# Altium PCB CKLink_Lite.PcbDoc
Units mm, origin at the board's own origin, x right, y up, seen from the top; angles counter-clockwise.
Board outline 32.25 x 14 mm, 2 copper layers (Top Layer, Bottom Layer); 28 components, 38 nets, 152 pads, 53 vias.
Unrouted connection lines stored in the file: 3.
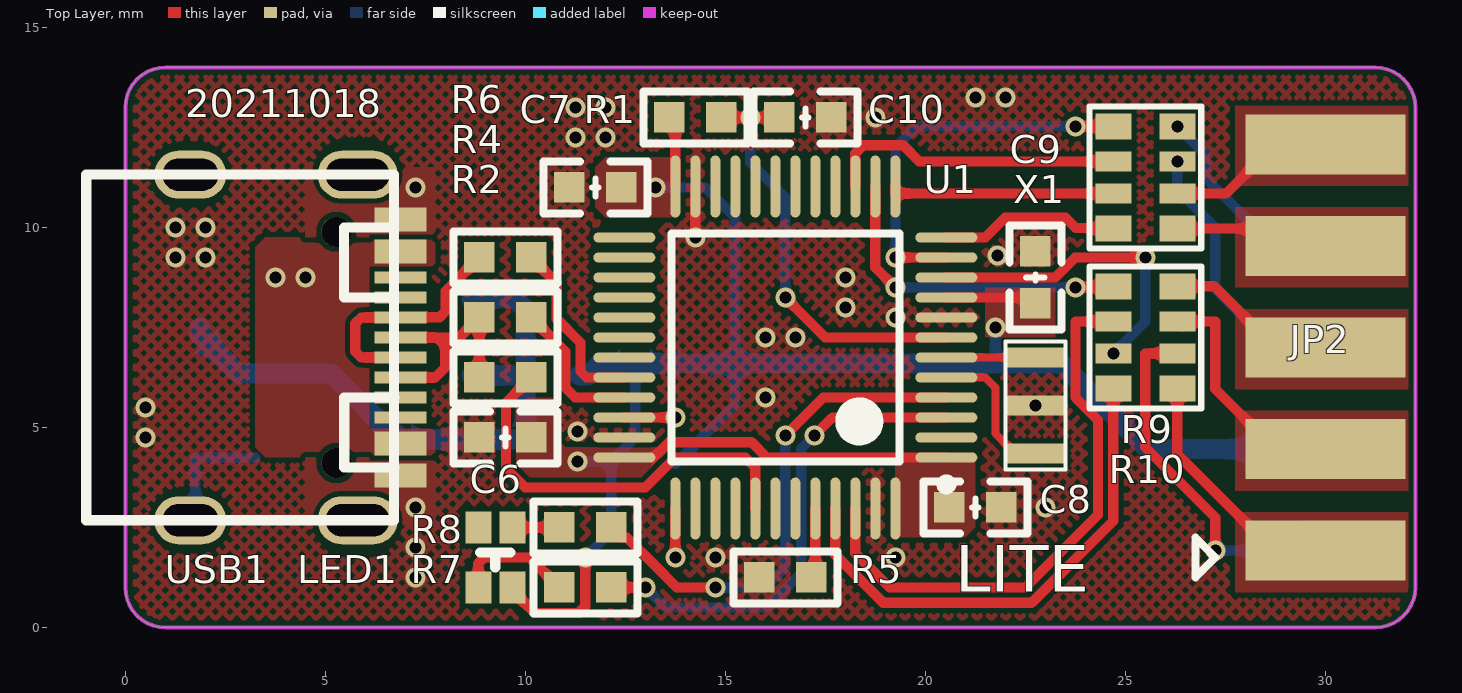
[diagram p0: Top Layer view]
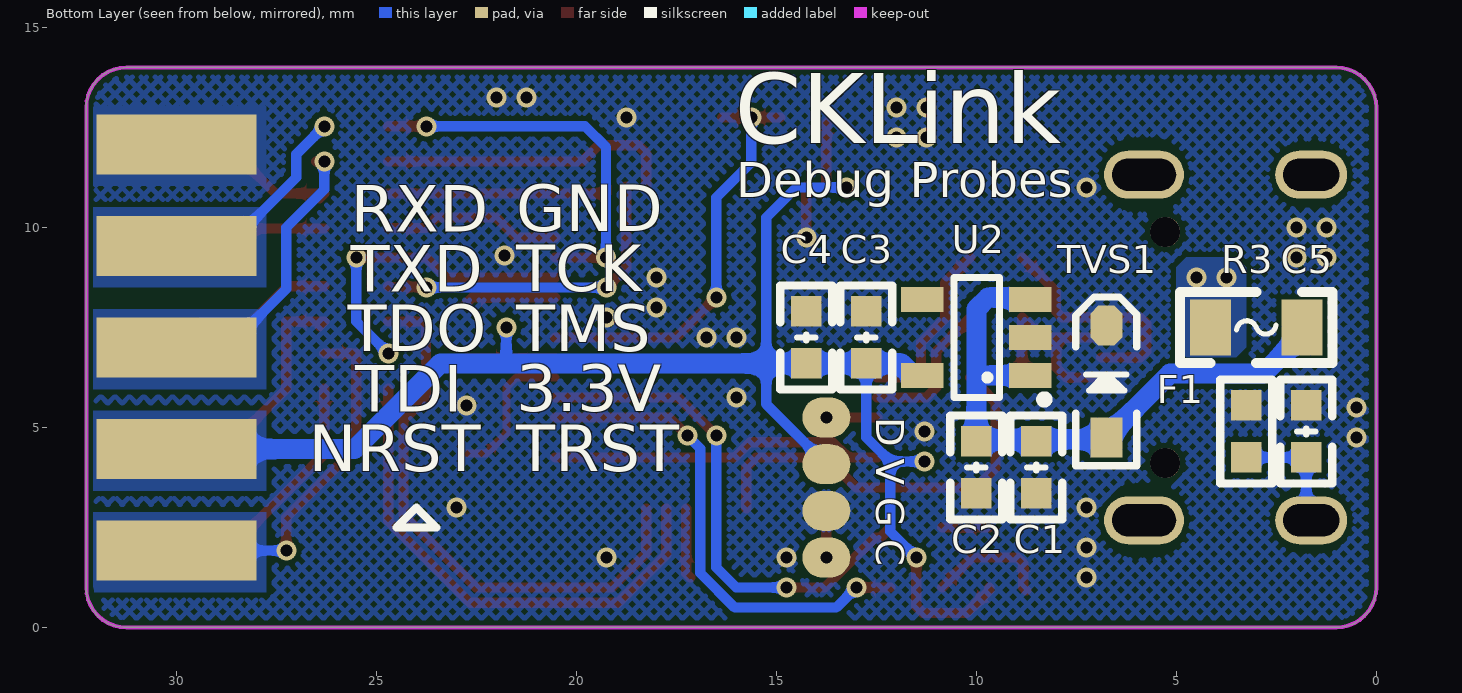
[diagram p1: Bottom Layer view, seen from below]
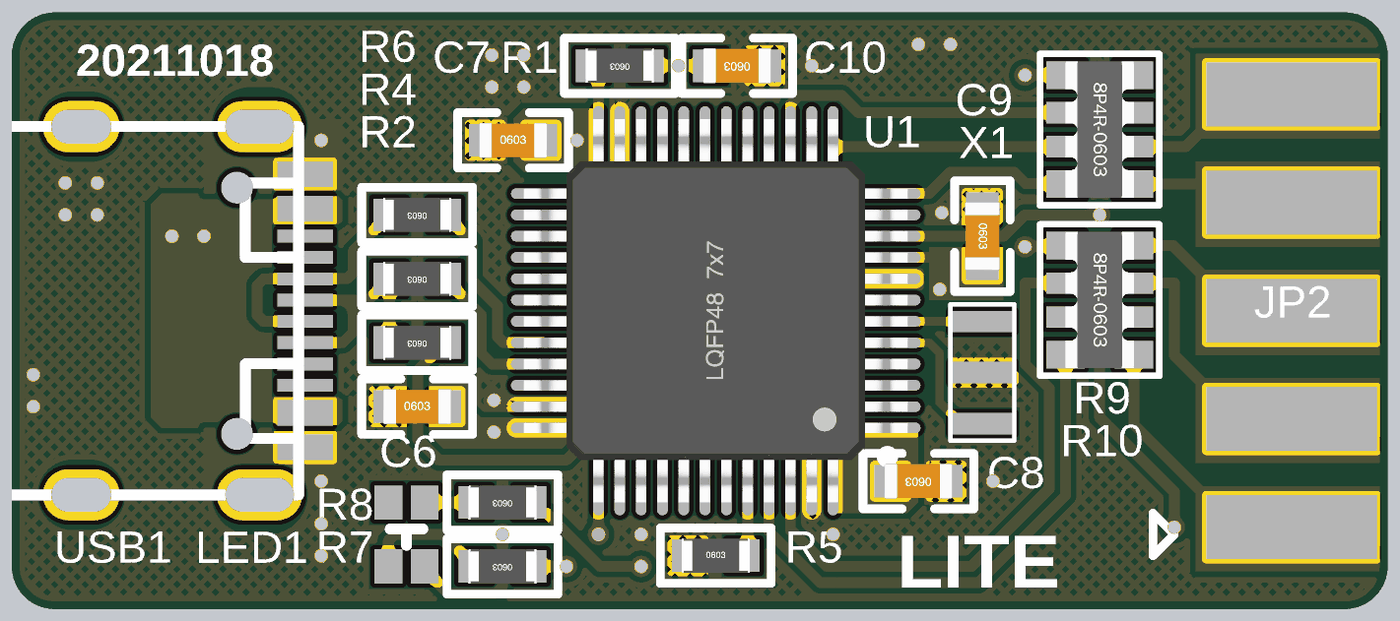
[diagram p2: 3D render of the assembled board from above, using the file's embedded part models]
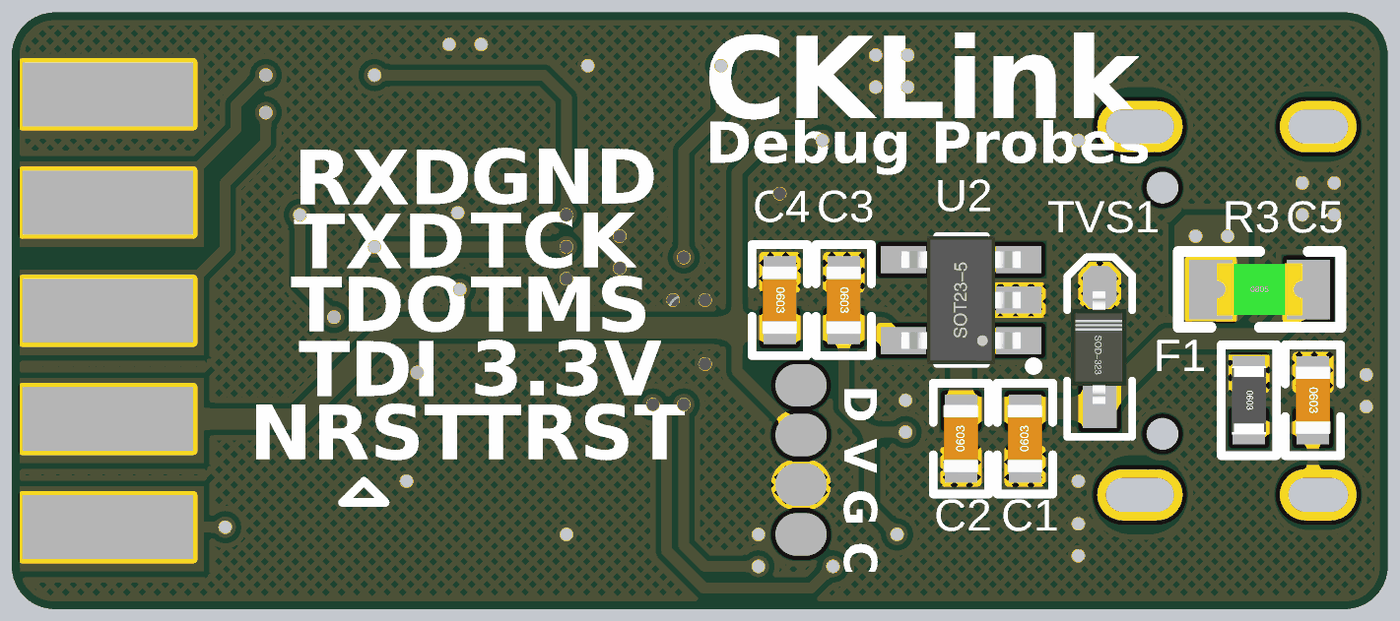
[diagram p3: 3D render of the assembled board from below, using the file's embedded part models]

## Layer stack, top to bottom
Top Solder: solder mask 0.0102, Solder Resist, Dk 3.5
Top Layer: signal copper 0.0356
Dielectric 1: dielectric 0.32, FR-4, Dk 4.8
Bottom Layer: signal copper 0.0356
Bottom Solder: solder mask 0.0102, Solder Resist, Dk 3.5

## Board outline
0,1 0,13 cw(c1,13) 1,14 31.25,14 cw(c31.25,13) 32.25,13 32.25,1 cw(c31.25,1) 31.25,0 1,0 cw(c1,1)

## Design rules (kind name [scope] priority, off if disabled: settings)
Clearance [All] p1: gap=0.127 ignorepadtopadclearanceinfootprint=FALSE
PolygonConnect [All] p1: connectstyle=Direct reliefconductorwidth=0.254 reliefentries=4 polygonreliefangle="90 Angle" airgapwidth=0.254
RoutingVias [All] p1: holewidth=0.711 width=1.27 viastyle="Through Hole" minholewidth=0.711 minwidth=1.27 maxholewidth=0.711 maxwidth=1.27
SolderMaskExpansion [All] p1: expansion=0.102 istentingtop=FALSE
Width [All] p1: maxlimit=2.54 minlimit=0.127 preferedwidth=0.254
30 further rules are at their usual default settings.

## Components (designator, comment, footprint, x,y, rotation, side; value= is the part's Value field where it differs from the comment)
C1 "1uF" "C 0603_L" 8.5,4 r90 bottom
C2 "104" "C 0603_L" 10,4 r90 bottom
C3 "104" "C 0603_L" 12.75,7.25 r270 bottom
C4 "4.7uF" "C 0603_L" 14.25,7.25 r270 bottom
C5 "103" "C 0603_L" 1.75,4.9 r270 bottom
C6 "104" "C 0603_L" 9.5,4.75 r0 top
C7 "104" "C 0603_L" 11.75,11 r0 top
C8 "104" "C 0603_L" 21.25,3 r180 top
C9 "104" "C 0603_L" 22.75,8.75 r270 top
C10 "104" "C 0603_L" 17,12.75 r180 top
F1 "6V 500mA" "FU 0805" 3,7.5 r180 bottom
JP2 "Header 5X2" CHE2*5 30,12.08 r270 top
LED1 "0603RGB" 0603RGB 9.25,1.75 r90 top
R1 "10k" "R 0603_L" 14.25,12.75 r180 top
R2 "1.5k" "R 0603_L" 9.5,6.25 r180 top
R3 "1M" "R 0603_L" 3.25,4.9 r270 bottom
R4 "22R" "R 0603_L" 9.5,7.75 r180 top
R5 "10k" "R 0603_L" 16.5,1.25 r0 top
R6 "22R" "R 0603_L" 9.5,9.25 r180 top
R7 "4.7k" "R 0603_L" 11.5,1 r180 top
R8 "4.7k" "R 0603_L" 11.5,2.5 r180 top
R9 "22R" RCA-8P4R-0603 25.5,11.25 r270 top
R10 "22R" RCA-8P4R-0603 25.5,7.25 r270 top
TVS1 "5V" SOD-323 6.75,6.15 r90 bottom
U1 "STM32F103C8T6" LQFP48_L 16.5,7 r180 top
U2 "ME6211C33" SOT23-5N 10,7.25 r90 bottom
USB1 "TYPE-C 2.0 -16P" USB-TYPE-C_16PIN-MALE-TYPE-C-31-M-12 4.25,7 r270 top
X1 "8MHz" "CSTCE 3pin" 22.75,5.55 r270 top

## Footprints (in the part's own frame and the unit in brackets; to place one, negate y for a bottom-side part, rotate by r counter-clockwise, add the part's x,y. Pads: shape width x height; smd on the part's side, far side on the other; paste and mask are expansions set on the pad)
0603RGB [mm]
  rect 0.8x0.65 smd: 1(-0.75,0.425) 2(0.75,0.425) 3(-0.75,-0.425) 4(0.75,-0.425)
  silkscreen extent -0.25,-0.38 0.13,0.38
"C 0603_L" [mil] "无极性贴片电容                                       淘宝ID:黄晶宝石"
  rect 30x30 smd: 1(-25.59,0) 2(25.59,0)
  silkscreen extent -51,-26 51,26, body extent -31,-16 31,16, height 32
CHE2*5 [mm] "侧边夹板式焊接排针"
  rect 1.5x4 smd: 1(0,0) 3(2.54,0) 5(5.08,0) 7(7.62,0) 9(10.16,0)
  rect 1.5x4 smd far side: 2(0,0) 4(2.54,0) 6(5.08,0) 8(7.62,0) 10(10.16,0)
"CSTCE 3pin" [mm] "村田CSTCE 3脚陶瓷晶振"
  rect 0.5x1.5 smd: 1(1.2,0) 2(0,0) 3(-1.2,0)
  silkscreen extent -1.6,-0.75 1.6,0.75
"FU 0805" [mil] "贴片保险丝"
  rect 40x55 smd: 1(-45,0) 2(45,0)
  silkscreen extent -75,-35 75,35, body extent -39,-24 39,24, height 20
LQFP48_L [mm] "封装库来自淘宝 ID：黄晶宝石 Thin QFP, 48-Leads, Body 7x7mm, Pitch 0.5mm, IPC High Density"
  oval 1.55x0.25 smd: 1(-4.025,2.75) 2(-4.025,2.25) 3(-4.025,1.75) 4(-4.025,1.25) 5(-4.025,0.75) 6(-4.025,0.25) 7(-4.025,-0.25) 8(-4.025,-0.75) 9(-4.025,-1.25) 10(-4.025,-1.75) 11(-4.025,-2.25) 12(-4.025,-2.75) 25(4.025,-2.75) 26(4.025,-2.25) 27(4.025,-1.75) 28(4.025,-1.25) 29(4.025,-0.75) 30(4.025,-0.25) 31(4.025,0.25) 32(4.025,0.75) 33(4.025,1.25) 34(4.025,1.75) 35(4.025,2.25) 36(4.025,2.75)
  oval 0.25x1.55 smd: 13(-2.75,-4.025) 14(-2.25,-4.025) 15(-1.75,-4.025) 16(-1.25,-4.025) 17(-0.75,-4.025) 18(-0.25,-4.025) 19(0.25,-4.025) 20(0.75,-4.025) 21(1.25,-4.025) 22(1.75,-4.025) 23(2.25,-4.025) 24(2.75,-4.025) 37(2.75,4.025) 38(2.25,4.025) 39(1.75,4.025) 40(1.25,4.025) 41(0.75,4.025) 42(0.25,4.025) 43(-0.25,4.025) 44(-0.75,4.025) 45(-1.25,4.025) 46(-1.75,4.025) 47(-2.25,4.025) 48(-2.75,4.025)
  silkscreen extent -4.15,-2.85 2.85,3.55, body extent -4.5,-4.5 4.5,4.5, height 1.45
"R 0603_L" [mil] "1/10W贴片电阻                 淘宝ID:黄晶宝石"
  rect 30x30 smd: 1(-25.59,0) 2(25.59,0)
  silkscreen extent -51,-26 51,26, body extent -31,-16 32,16, height 16
RCA-8P4R-0603 [mm] "3.2mm*1.6mm*0.6mm(长*宽*厚)"
  rect 0.65x0.9 smd: 1(-1.28,-0.8) 4(1.28,-0.8) 5(1.28,0.8) 8(-1.28,0.8)
  rect 0.5x0.9 smd: 2(-0.4,-0.8) 3(0.4,-0.8) 6(0.4,0.8) 7(-0.4,0.8)
  silkscreen extent -1.78,-1.4 1.78,1.4, body extent -1.6,-0.8 1.6,0.8, height 0.6
SOD-323 [mm] "1.8x1.3X0.9mm（长宽高，不包括引脚）"
  rect 1x0.8 smd: 1(-1.4,0)
  oct 1x0.8 smd: 2(1.4,0)
  silkscreen extent -2.11,-0.76 2.11,0.76, body extent -1.34,-0.63 1.31,0.67, height 1
SOT23-5N [mm] "3x1.6x1.1mm(长宽高)  封装库来自淘宝卖家 ID：黄晶宝石"
  rect 0.635x1.067 smd: 1(-0.95,-1.35) 2(0,-1.35) 3(0.95,-1.35) 4(0.95,1.35) 5(-0.95,1.35)
  silkscreen extent -1.63,-1.78 1.5,0.56, body extent -1.5,-1.4 1.5,1.4, height 1.15
USB-TYPE-C_16PIN-MALE-TYPE-C-31-M-12 [mm]
  oval 1.2x2 hole 0.8 slot 1.6 at 90 deg: 0(-4.32,1.556) 0(4.32,1.556)
  oval 1.2x1.8 hole 0.8 slot 1.4 at 90 deg: 0(-4.32,-2.624) 0(4.32,-2.624)
  rect 0.3x1.3 smd: A1(-3.35,2.623) A4(-2.55,2.623) A5(-1.25,2.623) A6(-0.25,2.623) A7(0.25,2.623) A8(1.25,2.624) A9(2.55,2.623) A12(3.35,2.623) B1(3.05,2.623) B4(2.25,2.623) B5(1.75,2.623) B6(0.75,2.623) B7(-0.75,2.623) B8(-1.75,2.624) B9(-2.25,2.623) B12(-3.05,2.623)
  round 0.75 hole 0.75 unplated: ""(-2.89,1.026) ""(2.89,1.026)
  silkscreen extent -4.32,-5.23 4.32,2.47

## Part data
C1 C2 C3 C4 C5 C6 C7 C8 C9 C10: library part C, "贴片电容", BOM名称=无极性贴片电容, 优秀评价可免费更新=联系淘宝ID：黄晶宝石，获取更新版封装库, 卖家免费技术支持，联系售后=唯一出售店铺网址https://shop463601444.taobao.com, 本封装库来自淘宝卖家 ID：黄晶宝石=其他店铺购入均为盗版，请立即申请退款
F1: library part FU, "贴片保险丝", BOM名称=贴片保险丝, 优秀评价可免费更新=联系淘宝ID：黄晶宝石，获取更新版封装库, 卖家免费技术支持，联系售后=唯一出售店铺网址https://shop463601444.taobao.com, 封装库来自淘宝卖家 ID：黄晶宝石=其他店铺购入均为盗版，请立即申请退款, 版权归属="封装库来自淘宝卖家 ID：黄晶宝石"
JP2: "5*2P接插件", BOM名称=5*2P接插件, 优秀评价可免费更新=联系淘宝ID：黄晶宝石，获取更新版封装库, 卖家免费技术支持，联系售后=唯一出售店铺网址https://shop463601444.taobao.com, 版权归属="封装库来自淘宝 ID：黄晶宝石"
R1 R2 R3 R4 R5 R6 R7 R8: library part R, "贴片电阻", BOM名称=贴片电阻, 优秀评价可免费更新=联系淘宝ID：黄晶宝石，获取更新版封装库, 卖家免费技术支持，联系售后=唯一出售店铺网址https://shop463601444.taobao.com, 本封装库来自淘宝卖家 ID：黄晶宝石=其他店铺购入均为盗版，请立即申请退款
R9 R10: library part R-8P4R, "贴片排阻", BOM名称=贴片网络排阻, 优秀评价可免费更新=联系淘宝ID：黄晶宝石，获取更新版封装库, 卖家免费技术支持，联系售后=唯一出售店铺网址https://shop463601444.taobao.com, 本封装库来自淘宝卖家 ID：黄晶宝石=其他店铺购入均为盗版，请立即申请退款
TVS1: library part TVS, "TVS保护", Code_JEDEC=DO-214-AB, 优秀评价可免费更新=联系淘宝ID：黄晶宝石，获取更新版封装库, 卖家免费技术支持，联系售后=唯一出售店铺网址https://shop463601444.taobao.com, 封装库 来自淘宝卖家 ID：黄晶宝石=其他店铺购入均为盗版，请立即申请退款
U1: "STM32 ARM-based 32-bit MCU Performance Line with 64 kB Flash, 20 kB Internal RAM, -40 to +85癈 Temperature, 48-Pin LQFP, Tray", DatasheetVersion="rev13.0, Apr-2011", PackageDescription="48-Pin Low-Profile Quad Flat Pack, 7 x 7 mm Body, 0.5 mm Pitch (LQFP48)", PackageReference=LQFP48, PackageVersion="rev13, Apr-2011", 优秀评价可免费更新=联系淘宝ID：黄晶宝石，获取更新版封装库, 卖家免费技术支持，联系售后=唯一出售店铺网址https://shop463601444.taobao.com, 封装库来自淘宝卖家 ID：黄晶宝石=其他店铺购入均为假冒，请申请退款，本店现金奖励
U2: "3.3V 500mA 低压差线性稳压器"
USB1: library part "USB2.0 Type-C 16Pin母座", "USB2.0 Type-C 母座 16Pin", BOM_Manufacturer=LCSC, BOM_Manufacturer Part=-, BOM_Supplier=LCSC, spicePre=U, spiceSymbolName="TYPE-C 3.1 -16P_C168689"
X1: library part XTAL-3P, "3脚无源晶振", BOM名称=4脚无源晶振, 优秀评价可免费更新=联系淘宝ID：黄晶宝石，获取更新版封装库, 卖家免费技术支持，联系售后=唯一出售店铺网址https://shop463601444.taobao.com, 封装库来自淘宝卖家 ID：黄晶宝石=其他店铺购入均为盗版，请立即申请退款, 版权归属="封装库来自淘宝卖家 ID：黄晶宝石"

## Free pads (board coordinates)
  oval 1.2x1 smd far side: 20(13.75,1.75) 21(13.75,2.917) 22(13.75,4.083) 23(13.75,5.25)

## Via types
v1: diameter 0.5, hole 0.3, Top Layer to Bottom Layer, tented both sides, 53 vias

## Nets (pads, with @x,y where several pads share a name; then routed paths per layer and width w, separated by ;. In a path a pad name is that pad's centre, name@x,y a point inside that pad or via, vN(x,y) a via of type N, cw(c..) or ccw(c..) an arc to the next point about the centre after c; other vN are vias at no path point)
3.3V: C3.2 C4.2 C6.2 C7.2 C8.2 C9.2 JP2.8 LED1.3 pad.22 R1.2 U1.1 U1.9 U1.24 U1.36 U1.48 U2.5 | length 51.7
  Top Layer w0.254: LED1.3 9.675,0.925 10.235,0.365 11.336,0.365 11.5,0.529 v1(11.5,1.75) ; U1.36 13.211,4.25 13.592,4.631 15.658,4.631 16.039,4.25 U1.1 ; R1.2 13.75,12.6 U1.24 ; U1.9 22.6,8.25 C9.2
  Bottom Layer w0.254: v1(11.3,4.15) 12.15,4.15 ; v1(11.5,1.75) 12.15,2.4 12.15,4.15 ; C3.2 12.75,4.75 12.15,4.15 ; v1(13.25,11) 14.5,11 15.25,10.25 15.25,6.6 15.25,5.583 pad.22 ; 21.75,6.6 v1(21.75,7.5)
  Bottom Layer w0.5: U2.5 11.566,6.3 11.866,6.6 C3.2 C4.2 15.25,6.6 21.75,6.6 23.4,6.6 25.54,4.46 JP2.8
BOOT0: R5.2 U1.44 | length 1.8
  Top Layer w0.254: R5.2 17.25,1.35 U1.44
GND: C1.1 C2.1 C3.1 C4.1 C5.1 C6.1 C7.1 C8.1 C9.1 C10.1 JP2.2 pad.21 R3.1 R5.1 TVS1.2 U1.8 U1.23 U1.35 U1.47 U2.2 USB1.A1 USB1.A12 USB1.B1 USB1.B12 X1.2 | length 1.3
  Top Layer w0.254: v1(14.25,9.75) U1.23
  other v1: 7.25,1.25 14.75,1.75 19.25,1.75 7.25,2 7.25,3 23,3 0.5,4.75 11.3,4.9 0.5,5.5 22.75,5.55 16,5.75 16,7.25 16.75,7.25 19.25,7.75 18,8 18,8.75 1.25,9.25 2,9.25 21.8,9.3 1.25,10 2,10 7.25,11 11.25,12.25 12,12.25 18.75,12.75 11.25,13 12,13 21.25,13.25 22,13.25
LED_BSY: R8.1 U1.4 | length 12.9
  Top Layer w0.254: R8.1 12.404,2.246 12.541,2.246 13.246,1.541 13.787,1 v1(14.75,1) ; v1(16.5,4.8) 17.45,5.75 U1.4
  Bottom Layer w0.254: v1(14.75,1) 16,1 16.5,1.5 v1(16.5,4.8)
LED_ERR: R7.1 U1.3 | length 12.4
  Top Layer w0.254: R7.1 v1(13,1) ; v1(17.224,4.798) 17.676,5.25 U1.3
  Bottom Layer w0.254: v1(13,1) 13.504,0.496 16.035,0.496 16.9,1.361 16.9,4.474 v1(17.224,4.798)
M_RST: C10.2 R1.1 U1.7 | length 10.8
  Top Layer w0.254: R1.1 v1(15.625,12.75) C10.2 ; v1(16.5,8.25) 17.5,7.25 19.037,7.25 19.041,7.246 19.459,7.246 19.463,7.25 U1.7
  Bottom Layer w0.254: v1(15.625,12.75) 15.625,11.625 16.5,10.75 v1(16.5,8.25)
M_SWD_CLK: pad.20 U1.37 | length 1.2
  Top Layer w0.254: v1(13.75,1.75) U1.37
M_SWD_DIO: pad.23 U1.34 | length 1.3
  Top Layer w0.254: U1.34 v1(13.75,5.25)
M_SWDCK: 
M_SWDIO: 
M_USB_CN: R2.1 U1.41 | length 10.4
  Top Layer w0.254: R2.1 9.515,5.615 9.515,3.985 10,3.5 13,3.5 13.75,4.25 15.5,4.25 15.75,4 U1.41
M_USB_DN: R6.1 U1.32 | length 4.5
  Top Layer w0.254: R6.1 10.785,8.615 10.785,7.715 11.381,7.119 11.381,6.399 11.53,6.25 U1.32
M_USB_DP: R4.1 U1.33 | length 3.8
  Top Layer w0.254: R4.1@10.075,7.675 R4.1 11,6.9 11,6 11.25,5.75 U1.33
NetC1_2: C1.2 C2.2 F1.2 TVS1.1 U2.1 U2.3 | length 16
  Bottom Layer w0.5: F1.2 1.857,7.31 2.822,6.344 5.156,6.344 6.5,5 6.6,5 6.75,4.85 TVS1.1 6.8,4.7 9.95,4.7 C2.2 10,6.304 ; U2.3 8.7,8.25 9.707,8.25 10,7.957 10,6.304 ; U2.1@8.933,6.233 8.718,6.233 U2.1 9.996,6.3 10,6.304
NetC5_2: C5.2 R3.2 USB1.0 | length 3.1
  Bottom Layer w0.254: USB1.0@1.626,2.68 1.75,2.804 C5.2 R3.2
NetLED1_1: LED1.1 R7.2 | length 3.1
  Top Layer w0.254: LED1.1@8.75,0.925 LED1.1 8.825,1.601 8.974,1.75 10.1,1.75 R7.2
NetLED1_4: LED1.4 R8.2 | length 1.2
  Top Layer w0.254: LED1.4 R8.2@10.85,2.5
NRST: R10.4 U1.45 | length 12.8
  Top Layer w0.254: U1.45 17.75,1.819 18.95,0.619 22.658,0.619 24.7,2.661 R10.4
NRST_: JP2.9 R10.5 | length 6.3
  Top Layer w0.254: R10.5 26.3,4.33 28.087,2.543 29.377,2.543 JP2.9
OSC_I: U1.5 X1.1 | length 3.7
  Top Layer w0.2: U1.5 21.5,6.25 21.75,6 21.75,4.85 22.25,4.35 X1.1
OSC_O: U1.6 X1.3 | length 2.2
  Top Layer w0.2: U1.6 X1.3
RXD: R9.3 U1.13 | length 5.6
  Top Layer w0.254: U1.13 19.25,10.852 19.252,10.85 R9.3
RXD_: JP2.1 R9.6 | length 5
  Top Layer w0.254: R9.6@26.423,10.727 R9.6 27.52,10.85 28.75,12.08 JP2.1 JP2.1@29.55,12.53
TCK: R9.1 U1.11 | length 9.7
  Top Layer w0.254: v1(19.254,9.25) U1.11 ; v1@23.78,12.53 R9.1
  Bottom Layer w0.254: v1(19.254,9.25) 19.254,12.004 19.78,12.53 v1(23.75,12.53)
TCK_: JP2.4 R9.8 | length 5.3
  Bottom Layer w0.254: v1(26.3,12.53) 27,11.83 27,11.25 28.087,10.163 29.377,10.163 JP2.4
TDI: R10.2 U1.46 | length 14.3
  Top Layer w0.254: U1.46 18.25,1.858 19.108,1 22.5,1 24.319,2.819 24.319,5.181 23.754,5.746 23.754,7.65 R10.2
TDI_: JP2.7 R10.7 | length 6.2
  Top Layer w0.254: R10.7@26.423,7.527 R10.7 27.25,7.65 27.25,5.96 28.75,4.46 JP2.7
TDO: R10.1 U1.14 | length 8.2
  Top Layer w0.254: U1.14 18.75,9 v1(19.25,8.5) ; v1(23.75,8.5) 23.765,8.515 24.685,8.515 R10.1
  Bottom Layer w0.254: v1(19.25,8.5) v1(23.75,8.5)
TDO_: JP2.5 R10.8 | length 4.3
  Top Layer w0.254: R10.8 27.22,8.53 28.75,7 JP2.5
TMS: R9.2 U1.15 | length 7.5
  Top Layer w0.254: U1.15 18.25,11.851 18.453,12.054 19.446,12.054 19.85,11.65 R9.2
TMS_: JP2.6 R9.7 | length 7.1
  Top Layer w0.254: v1(26.3,11.65) R9.7@26.5,11.65
  Bottom Layer w0.254: v1(26.3,11.65) 26.3,10.95 27.25,10 27.25,8.46 28.087,7.623 29.377,7.623 JP2.6
TRST: R10.3 U1.10 | length 8.1
  Top Layer w0.254: U1.10 23.25,8.75 23.75,9.25 v1(25.5,9.25) ; v1(24.7,6.85) R10.3@24.823,6.973
  Bottom Layer w0.254: v1(24.7,6.85) 25.5,7.65 v1(25.5,9.25)
TRST_: JP2.10 R10.6 | length 9.2
  Top Layer w0.254: R10.6 25.504,6.85 25.5,6.846 25.5,4.5 27.25,2.75 v1(27.25,1.92)
  Bottom Layer w0.254: v1(27.25,1.92) JP2.10
TXD: R9.4 U1.12 | length 4.5
  Top Layer w0.254: U1.12 21.5,9.75 22,10.25 23.5,10.25 23.768,9.982 24.688,9.982 R9.4
TXD_: JP2.3 R9.5 | length 5.1
  Top Layer w0.254: R9.5 29.57,9.97 JP2.3 JP2.3@28.75,9.54
USB_5V: F1.1 USB1.A4 USB1.A9 USB1.B4 USB1.B9
  other v1: 3.75,8.75 4.5,8.75
USB_DN: R6.2 USB1.A7 USB1.B7 | length 6
  Top Layer w0.254: USB1.A7 5.899,6.75 5.75,6.899 5.75,7.601 5.899,7.75 USB1.B7 ; USB1.B7@6.879,7.756 7.857,7.756 8.006,7.905 8.006,8.406 R6.2
USB_DP: R2.2 R4.2 USB1.A6 USB1.B6 | length 5.7
  Top Layer w0.254: USB1.B6 7.75,6.25 8,6.5 8,7.25 ; USB1.A6 8,7.25 ; R2.2 R4.2 8.35,7.25 8,7.25
pads on no net: LED1.2 U1.2 U1.16 U1.17 U1.18 U1.19 U1.20 U1.21 U1.22 U1.25 U1.26 U1.27 U1.28 U1.29 U1.30 U1.31 U1.38 U1.39 U1.40 U1.42 U1.43 U2.4 USB1. USB1.A5 USB1.A8 USB1.B5 USB1.B8

## Polygon pours and split planes (outlines as drawn)
GND on Bottom Layer "GND_L02_P025" (hatched 45Degree grid 0.254 track 0.127, remove dead copper, pour order 25): -2,16 35,16 35,-2 -2,-2
TMS_ on Bottom Layer "TMS__L02_P022" (solid, pour order 22): 27.75,7.96 32.25,7.96 32.25,5.96 27.75,5.96
TCK_ on Bottom Layer "TCK__L02_P020" (solid, pour order 20): 27.75,10.5 32.25,10.5 32.25,8.5 27.75,8.5
TRST_ on Bottom Layer "TRST__L02_P024" (solid, pour order 24): 27.75,2.88 32.25,2.88 32.25,0.88 27.75,0.88
3.3V on Bottom Layer "3.3V_L02_P023" (solid, pour order 23): 27.75,5.42 32.25,5.42 32.25,3.42 27.75,3.42
GND on Bottom Layer "GND_L02_P021" (solid, pour order 21): 27.75,13.04 32.25,13.04 32.25,11.04 27.75,11.04
USB_5V on Bottom Layer "USB_5V_L02_P003" (solid, pour order 3): 3.5,6.75 3.25,7 3.25,9 3.5,9.25 4.75,9.25 5,9 5,7 4.75,6.75
GND on Top Layer "GND_L01_P026" (hatched 45Degree grid 0.254 track 0.127, remove dead copper, pour order 26): -2,16 35,16 35,-2 -2,-2
USB_5V on Top Layer "USB_5V_L01_P010" (solid, pour order 10): 7.75,9.75 7.75,4.25 3.5,4.25 3.25,4.5 3.25,9.5 3.5,9.75
3.3V on Top Layer "3.3V_L01_P008" (solid, pour order 8): 11,4.5 10.75,4.75 10.75,5.75 10.5,6 9.75,6 9.75,4 10,3.75 13.5,3.75 13.5,4.5
TXD_ on Top Layer "TXD__L01_P014" (solid, pour order 14): 27.75,10.5 32.25,10.5 32.25,8.5 27.75,8.5
3.3V on Top Layer "3.3V_L01_P013" (solid, pour order 13): 21.5,8.5 23.25,8.5 23.25,7.25 21.5,7.25
RXD_ on Top Layer "RXD__L01_P015" (solid, pour order 15): 27.75,13.04 32.25,13.04 32.25,11.04 27.75,11.04
TDO_ on Top Layer "TDO__L01_P016" (solid, pour order 16): 27.75,7.96 32.25,7.96 32.25,5.96 27.75,5.96
TDI_ on Top Layer "TDI__L01_P017" (solid, pour order 17): 27.75,5.42 32.25,5.42 32.25,3.42 27.75,3.42
NRST_ on Top Layer "NRST__L01_P018" (solid, pour order 18): 27.75,2.88 32.25,2.88 32.25,0.88 27.75,0.88
3.3V on Top Layer "3.3V_L01_P012" (solid, pour order 12): 21,2.25 21.25,2.5 21.25,4.25 19.25,4.25 19.25,2.25
3.3V on Top Layer "3.3V_L01_P011" (solid, pour order 11): 13.75,10.25 13.75,11.75 12,11.75 11.75,11.5 11.75,10.5 12,10.25
GND on Top Layer "GND_L01_P007" (solid, pour order 7): 4.5,4.25 7.75,4.25 7.75,2.5 4.5,2.5
GND on Top Layer "GND_L01_P006" (solid, pour order 6): 4.5,9.75 7.75,9.75 7.75,11.5 4.5,11.5

## Keep-outs
Keep-Out Layer:
  the board outline again, w0.1

## Silkscreen, mask and mechanical layers (free items; w line width, h text height)
Top Overlay:
  lines w0.1: 27.25,1.75 27.25,1.75
  lines w0.2: 26.75,1.25 26.75,2.25 27.25,1.75 26.75,1.25
  text "20211018" at 1.5,12.514 h1.2
  text "LITE" at 20.75,0.5 h2
Bottom Overlay:
  lines w0.1: 24,3 24,3
  lines w0.2: 23.5,2.5 24,3 24.5,2.5 23.5,2.5
  text "CKLink" at 16.036,11.525 h3
  text "Debug Probes" at 16,10.473 h1.5
  text "GND" at 21.5,9.517 h2
  text "RXD" at 25.642,9.5 h2
  text "TCK" at 21.5,8.017 h2
  text "TXD" at 25.639,8 h2
  text "TMS" at 21.5,6.517 h2
  text "TDO" at 25.713,6.517 h2
  text "D V G C" at 12.74,5.25 h1.2 r90
  text "3.3V" at 21.5,5.017 h2
  text "TDI" at 25.528,5 h2
  text "TRST" at 21.5,3.517 h2
  text "NRST" at 26.688,3.517 h2
Mechanical 1:
  the board outline again, w0.1